# Altium PCB PCB1.PcbDoc
Units mm, origin at the board's own origin, x right, y up, seen from the top; angles counter-clockwise.
Board outline 40 x 47 mm, 2 copper layers (Top Layer, Bottom Layer); 27 components, 45 nets, 130 pads, 11 vias.
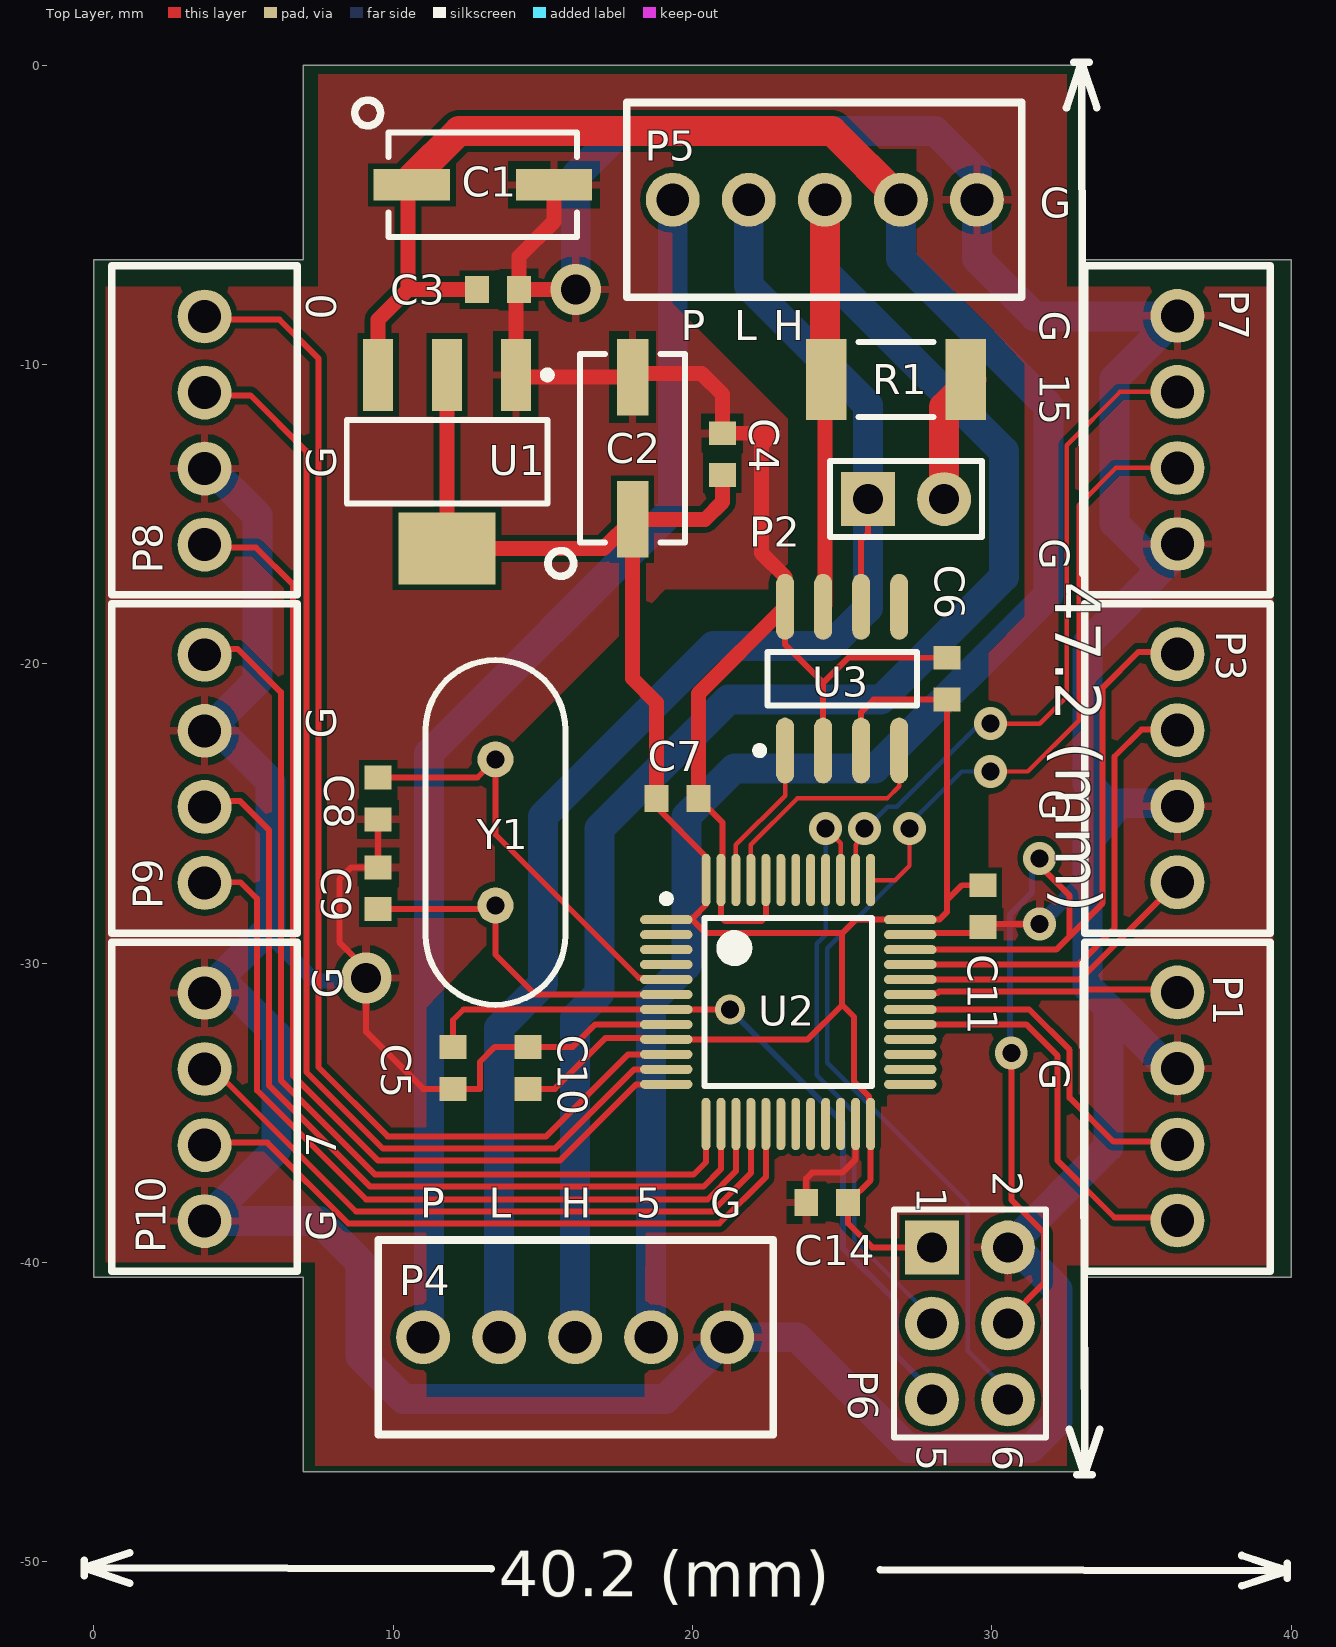
[diagram p0: Top Layer view]
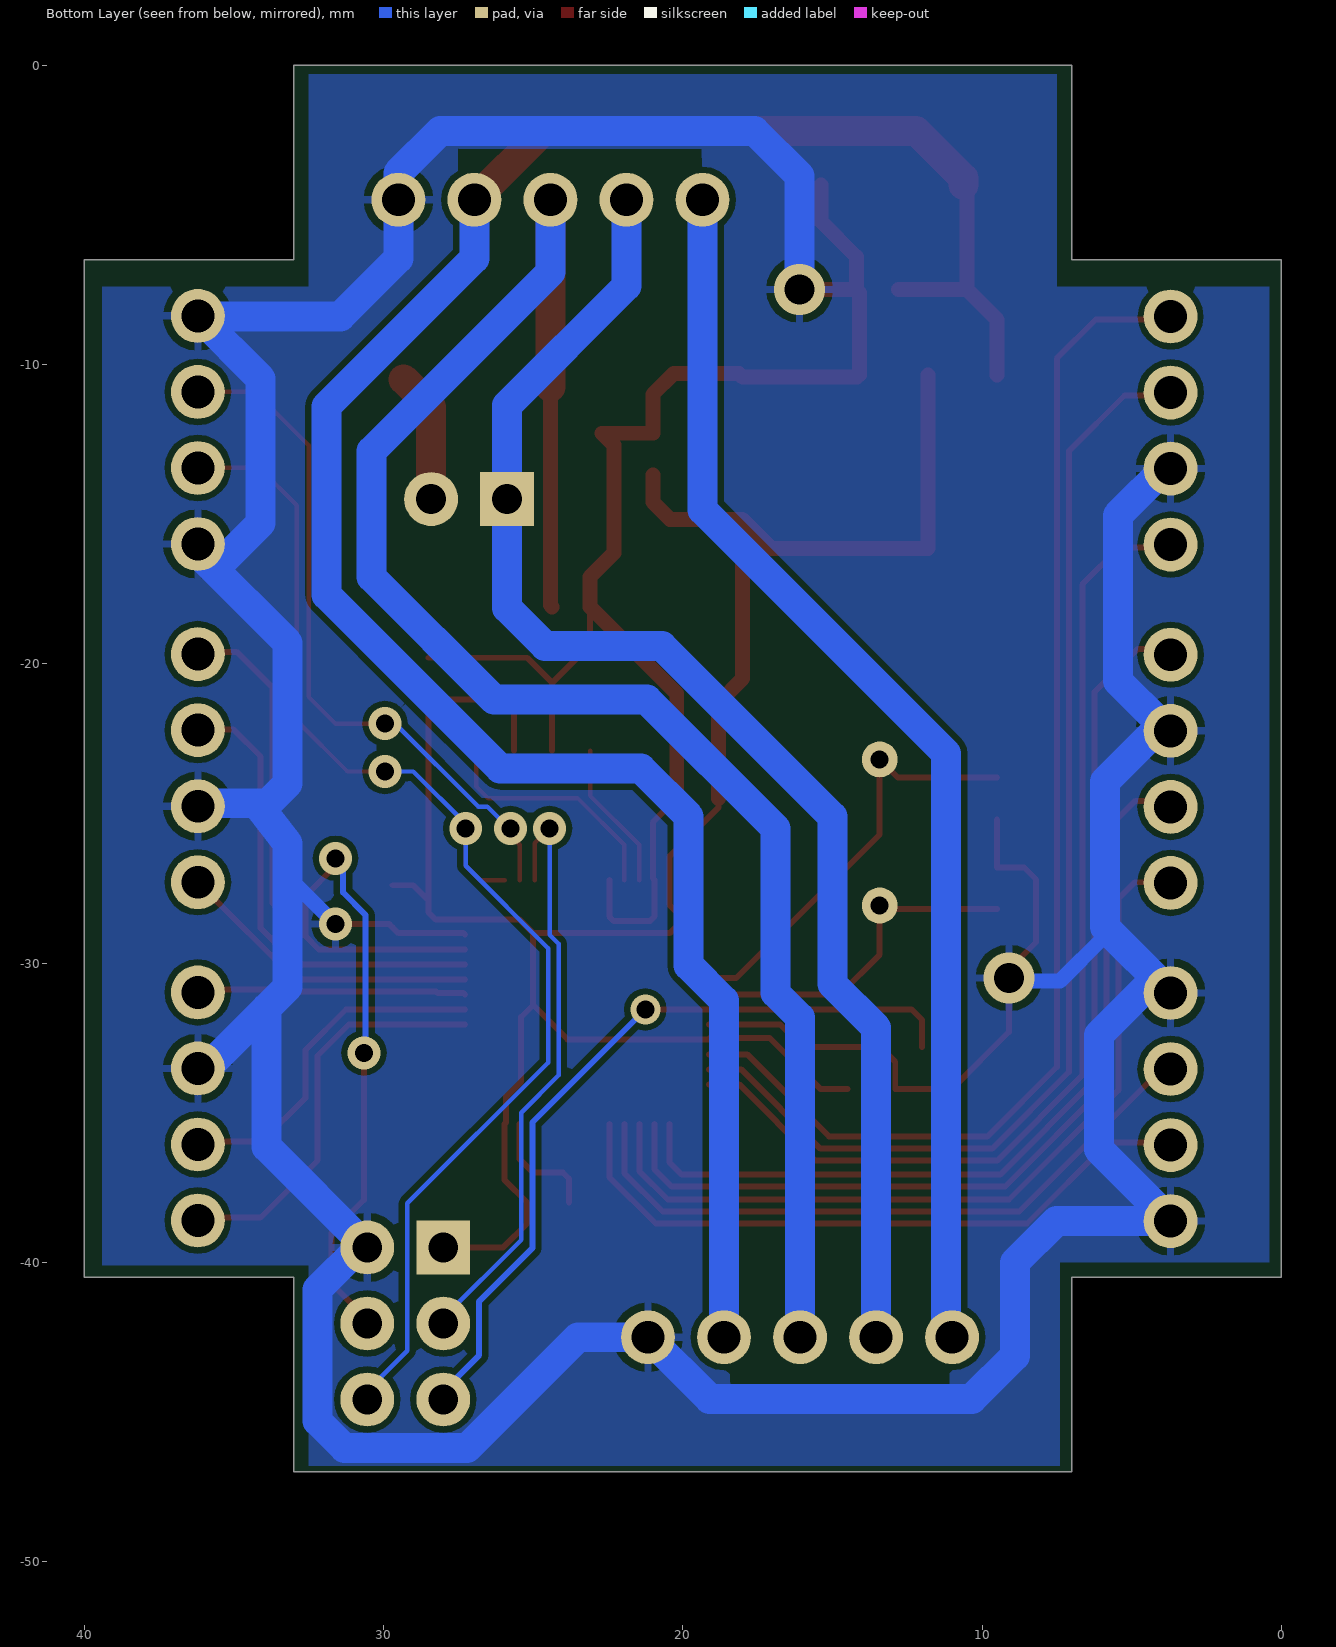
[diagram p1: Bottom Layer view, seen from below]

## Layer stack, top to bottom
Top Layer: signal copper 0.0356
Dielectric: dielectric 0.32, FR-4, Dk 4.8
Bottom Layer: signal copper 0.0356

## Board outline
7,-40.5 7,-47 33,-47 33,-40.5 40,-40.5 40,-6.5 33,-6.5 33,0 7,0 7,-6.5 0,-6.5 0,-40.5

## Design rules (kind name [scope] priority, off if disabled: settings)
Clearance [All] p1: gap=0.2
ComponentClearance Connectors [InComponent('P*') vs InComponent('P*')] p1: gap=0 collisioncheckmode=3 verticalgap=0.254 showdistances=FALSE
ComponentClearance All [All] p2: gap=0.254 collisioncheckmode=3 verticalgap=0.254 showdistances=FALSE
HoleSize [All] p1: absolutevalues=TRUE maxlimit=4 minlimit=0.4 maxpercent=80.000 minpercent=20.000
HoleToHoleClearance [All] p1: gap=0.2 allowstackedmicrovias=TRUE
MinimumSolderMaskSliver [All] p1: minsoldermaskwidth=0.25
PolygonConnect [All] p1: connectstyle=Relief reliefconductorwidth=0.254 reliefentries=4 polygonreliefangle="90 Angle" airgapwidth=0.254
RoutingVias [All] p1: holewidth=0.4 width=0.9 viastyle="Through Hole" minholewidth=0.4 minwidth=0.9 maxholewidth=0.8 maxwidth=1.3
SilkToSilkClearance [All] p1: silktosilkclearance=0.25
SilkToSolderMaskClearance [IsPad] p1: minsilkscreentomaskgap=0.075 clearancetoexposedcopper=TRUE
SolderMaskExpansion [All] p1: expansion=0.102
Width [All] p1: maxlimit=1 minlimit=0.15 preferedwidth=0.15
22 further rules are at their usual default settings.

## Components (designator, comment, footprint, x,y, rotation, side; value= is the part's Value field where it differs from the comment)
C1 "Cap Pol3" CAPM6032X28N 13,-4 r0 top
C2 "Cap Pol3" CAPM6032X28N 18,-12.8 r90 top
C3 "Cap Semi" 1608[0603] 13.5,-7.5 r180 top
C4 "Cap Semi" 1608[0603] 21,-13 r270 top
C5 "Cap Semi" 1608[0603] 12,-33.5 r270 top
C6 "Cap Semi" 1608[0603] 28.5,-20.5 r270 top
C7 "Cap Semi" 1608[0603] 19.5,-24.5 r180 top
C8 "Cap Semi" 1608[0603] 9.5,-24.5 r90 top
C9 "Cap Semi" 1608[0603] 9.5,-27.5 r270 top
C10 "Cap Semi" 1608[0603] 14.5,-33.5 r270 top
C11 "Cap Semi" 1608[0603] 29.7,-28.1 r90 top
C14 "Cap Semi" 1608[0603] 24.5,-38 r0 top
P1 "Header 4" PH_CONN_4 32.9,-40.4 r90 top
P2 "CAN_TERM" HDR1X2 25.865,-14.5 r0 top
P3 "Header 4" PH_CONN_4 32.9,-29.1 r90 top
P4 "Header 5" CONN_5 11,-42.5 r0 top
P5 "Header 5" CONN_5 29.5,-4.5 r180 top
P6 "Header 6" HDR2X3 28,-39.5 r270 top
P7 "Header 4" PH_CONN_4 32.9,-17.8 r90 top
P8 "Header 4" PH_CONN_4 7,-6.6 r270 top
P9 "Header 4" PH_CONN_4 7,-17.9 r270 top
P10 "Header 4" PH_CONN_4 7,-29.2 r270 top
R1 "Res3" RESC5025X07N 26.8,-10.5 r180 top
U1 "LD1117S33" SOT230P700X180-4N 11.8,-13.25 r270 top
U2 "STM32F303" TSQFP50P900X900X160-48N 23.2,-31.3 r0 top
U3 "SN65HVD230DR" SOIC127P600X175-8N 25,-20.5 r90 top
Y1 "XTAL" HC49/US 12.5,-28.5 r315 top

## Footprints (in the part's own frame and the unit in brackets; to place one, negate y for a bottom-side part, rotate by r counter-clockwise, add the part's x,y. Pads: shape width x height; smd on the part's side, far side on the other; paste and mask are expansions set on the pad)
1608[0603] [mm] "Chip Capacitor, Body 1.6x0.8mm, IPC High Density"
  rect 0.8x0.9 smd: 1(-0.7,0) 2(0.7,0)
  body extent -0.87,-0.48 0.87,0.48, height 1.3
CAPM6032X28N [mm] "Molded Capacitor, 2-Leads, Body 6.00x3.20mm, IPC Medium Density"
  rect 2.55x1.05 smd: 1(-2.375,0) 2(2.375,0)
  silkscreen extent -4.28,-1.75 3.15,2.83, body extent -3.15,-1.75 3.15,1.75, height 2.8
CONN_5 [mm]
  round 1.8 hole 1.1: 1(0,0) 2(2.54,0) 3(5.08,0) 4(7.62,0) 5(10.16,0)
  silkscreen extent -1.5,-3.25 11.7,3.25
HC49/US [mm]
  round 1.2 hole 0.6: 1(-3.1,4.4) 2(0.351,0.949)
  silkscreen extent -6.13,-2.08 3.38,7.43
HDR1X2 [mm] "Connector; Header; 2 Position"
  rect 1.8x1.8 hole 1: 1(0,0)
  round 1.8 hole 1: 2(2.54,0)
  silkscreen extent -1.27,-1.27 3.81,1.27
HDR2X3 [mm] "Connector; Header; 3x2 Position"
  rect 1.8x1.8 hole 1: 1(0,0)
  round 1.8 hole 1: 2(0,2.54) 3(2.54,0) 4(2.54,2.54) 5(5.08,0) 6(5.08,2.54)
  silkscreen extent -1.27,-1.27 6.35,3.81
PH_CONN_4 [mm]
  round 1.8 hole 1.1: 1(1.8,-3.3) 2(4.34,-3.3) 3(6.88,-3.3) 4(9.42,-3.3)
  silkscreen extent 0.1,-6.4 11.1,-0.2
RESC5025X07N [mm] "Chip Resistor, 2-Leads, Body 5.00x2.50mm, IPC Medium Density"
  rect 1.35x2.7 smd: 1(-2.325,0) 2(2.325,0)
  silkscreen extent -1.25,-1.25 1.25,1.25, body extent -2.57,-1.33 2.58,1.32, height 0.7
SOIC127P600X175-8N [mm] "SOIC, 8-Leads, Body 4.90x3.90mm, Pitch 1.27mm, IPC Medium Density"
  oval 2.2x0.6 smd: 1(-2.4,1.905) 2(-2.4,0.635) 3(-2.4,-0.635) 4(-2.4,-1.905) 5(2.4,-1.905) 6(2.4,-0.635) 7(2.4,0.635) 8(2.4,1.905)
  silkscreen extent -2.52,-2.5 0.9,2.88, body extent -2,-2.5 2,2.5, height 1.75
SOT230P700X180-4N [mm] "SOT223, 4-Leads, Body 6.50x7.00mm (avg), Pitch 2.30mm, IPC Medium Density"
  rect 2.4x1 smd: 1(-2.9,2.3) 2(-2.9,0) 3(-2.9,-2.3)
  rect 2.4x3.25 smd: 2(2.9,0)
  silkscreen extent -3.02,-3.35 1.4,3.48, body extent -1.85,-3.35 1.85,3.35, height 1.8
TSQFP50P900X900X160-48N [mm] "TSQFP, 48-Leads, Body 7.00x7.00mm, Pitch 0.50mm, IPC Medium Density"
  oval 1.75x0.3 smd: 1(-4.075,2.75) 2(-4.075,2.25) 3(-4.075,1.75) 4(-4.075,1.25) 5(-4.075,0.75) 6(-4.075,0.25) 7(-4.075,-0.25) 8(-4.075,-0.75) 9(-4.075,-1.25) 10(-4.075,-1.75) 11(-4.075,-2.25) 12(-4.075,-2.75) 25(4.075,-2.75) 26(4.075,-2.25) 27(4.075,-1.75) 28(4.075,-1.25) 29(4.075,-0.75) 30(4.075,-0.25) 31(4.075,0.25) 32(4.075,0.75) 33(4.075,1.25) 34(4.075,1.75) 35(4.075,2.25) 36(4.075,2.75)
  oval 0.3x1.75 smd: 13(-2.75,-4.075) 14(-2.25,-4.075) 15(-1.75,-4.075) 16(-1.25,-4.075) 17(-0.75,-4.075) 18(-0.25,-4.075) 19(0.25,-4.075) 20(0.75,-4.075) 21(1.25,-4.075) 22(1.75,-4.075) 23(2.25,-4.075) 24(2.75,-4.075) 37(2.75,4.075) 38(2.25,4.075) 39(1.75,4.075) 40(1.25,4.075) 41(0.75,4.075) 42(0.25,4.075) 43(-0.25,4.075) 44(-0.75,4.075) 45(-1.25,4.075) 46(-1.75,4.075) 47(-2.25,4.075) 48(-2.75,4.075)
  silkscreen extent -4.2,-2.8 2.8,3.57, body extent -3.5,-3.5 3.5,3.5, height 1.6

## Part data
C1 C2: "Polarized Capacitor (Surface Mount)"
C3 C4 C5 C6 C7 C8 C9 C10 C11 C14: "Capacitor (Semiconductor SIM Model)"
P1 P3 P7 P8 P9 P10: "Header, 4-Pin"
P2: library part "Header 2", "Header, 2-Pin"
P4 P5: "Header, 5-Pin"
P6: "Header, 6-Pin"
R1: "Resistor"
Y1: "Crystal Oscillator"

## Via types
v1: diameter 1.1, hole 0.6, Top Layer to Bottom Layer, 8 vias
v2: diameter 1.7, hole 1, Top Layer to Bottom Layer, 2 vias
v3: diameter 1, hole 0.6, Top Layer to Bottom Layer, 1 vias

## Nets (pads, with @x,y where several pads share a name; then routed paths per layer and width w, separated by ;. In a path a pad name is that pad's centre, name@x,y a point inside that pad or via, vN(x,y) a via of type N, cw(c..) or ccw(c..) an arc to the next point about the centre after c; other vN are vias at no path point)
5V: C1.1 C3.2 P4.4 P5.2 U1.3 | length 75.6
  Top Layer w0.5: U1.3 9.5,-8.5 10.5,-7.5 ; C1.1 10.5,-4.125 10.5,-7.5 ; C3.2 10.5,-7.5
  Top Layer w1: C1.1 10.625,-3.775 12.2,-2.2 24.66,-2.2 P5.2
  Bottom Layer w1: P4.4 18.62,-31.257 19.8,-30.077 19.8,-25.1 21.4,-23.5 26.1,-23.5 31.9,-17.7 31.9,-11.4 26.96,-6.46 P5.2
12V: P4.1 P5.5 | length 41.5
  Bottom Layer w1: P4.1 11.2,-42.3 11.2,-23 19.34,-14.86 P5.5
CAN_RX: U2.45 U3.4 | length 8.1
  Top Layer w0.15: U2.45 21.95,-26.05 23.5,-24.5 26.5,-24.5 26.905,-24.095 U3.4
CAN_TX: U2.46 U3.1 | length 5
  Top Layer w0.15: U2.46 21.45,-26.05 23.095,-24.405 U3.1
CANH: P4.3 P5.3 R1.2 U3.7 | length 63
  Top Layer w0.5: U3.7 24.42,-18.045 R1.2@24.42,-10.755
  Top Layer w1: R1.2@24.42,-10.755 P5.3
  Bottom Layer w1: P4.3 16.08,-31.82 16.9,-31 16.9,-25.5 21.2,-21.2 26.3,-21.2 30.4,-17.1 30.4,-12.9 24.42,-6.92 P5.3
CANL: P2.1 P4.2 P5.4 U3.6 | length 50.7
  Top Layer w0.2: U3.6 25.635,-15.865 25.865,-15.635 P2.1
  Bottom Layer w1: P4.2 13.54,-32.16 15,-30.7 15,-25.103 20.698,-19.405 24.595,-19.405 25.865,-18.135 P2.1 25.865,-11.365 21.88,-7.38 P5.4
GND: C1.2 C2.2 C3.1 C4.1 C5.2 C6.1 C7.1 C8.1 C9.1 C10.1 C11.1 C14.1 P1.3 P3.2 P4.5 P5.1 P6.2 P7.1 P7.4 P8.3 P9.2 P10.1 P10.4 U1.1 U2.8 U2.23 U2.35 U2.44 U2.47 U3.2 U3.8 | length 228.4
  Top Layer w0.2: C8.1 C9.1 8.6,-26.8 8.2,-27.2 8.2,-29.3 9.1,-30.2 9.1,-32.3 11,-34.2 C5.2 12.9,-34.2 12.9,-33.3 13.4,-32.8 C10.1 16,-32.8 16.75,-32.05 U2.8 ; U1.1 U1.1@14.175,-10.425 ; C7.1 21,-25.3 21,-27.175 U2.47 20.95,-28.45 21.1,-28.6 22.3,-28.6 22.45,-28.45 U2.44 ; U3.8 23.095,-19.365 24.365,-20.635 ; C14.1 23.8,-37.2 24,-37 25,-37 25.45,-36.55 U2.23 ; U3.2 24.365,-20.635 ; U2.35 27.325,-29 29.5,-29 C11.1 29.8,-28.7 v1(31.6,-28.7) ; C6.1 25.2,-19.8 24.365,-20.635
  Top Layer w0.5: U1.1 14.1,-7.6 C3.1 ; U1.1@14.175,-10.425 C2.2 18.125,-10.3 20.3,-10.3 21,-11 C4.1 22.7,-12.3 22.3,-12.7 22.3,-16.3 23.095,-17.095 U3.8 20.2,-20.995 C7.1 ; C1.2 15.375,-5.225 14.2,-6.4 C3.1 ; v2(16.1,-7.5) C3.1
  Bottom Layer w0.5: 5.9,-29.1 7.4,-30.6 9.3,-30.6 9.2,-30.5 v2(9.1,-30.5) ; v1(31.6,-28.7) 33.2,-27.1
  Bottom Layer w1: P10.4 6.1,-36.22 6.1,-32.4 P10.1@4.2,-30.5 ; P10.1 5.9,-28.8 5.9,-23.94 4,-22.04 5.462,-20.578 5.462,-15.042 P8.3@3.8,-13.38 ; P10.4@4.4,-38.62 7.52,-38.62 8.9,-40 8.9,-43.12 10.34,-44.56 19.1,-44.56 P4.5 23.5,-42.5 27.2,-46.2 31.3,-46.2 32.2,-45.3 32.2,-40.9 30.8,-39.5 P6.2 33.9,-36.14 33.9,-31.5 ; v2(16.1,-7.5) 16.1,-3.7 17.6,-2.2 28.1,-2.2 29.5,-3.6 P5.1 29.5,-6.46 31.44,-8.4 36.18,-8.4 34.1,-10.48 34.1,-15.3 35.3,-16.5 36,-16.5 33.2,-19.3 33.2,-24 33.9,-24.7 33.9,-24.66 P3.2@36,-24.66 ; 34.24,-24.66 33.2,-26 33.2,-30.8 33.9,-31.5 ; P1.3@36.4,-33.32 35.72,-33.32 33.9,-31.5
NetC8_2: C8.2 U2.5 Y1.1 | length 14.4
  Top Layer w0.2: C8.2 12.816,-23.8 Y1.1 13.419,-25.706 18.214,-30.5 19.075,-30.5 U2.5
NetC9_2: C9.2 U2.6 Y1.2 | length 11.9
  Top Layer w0.2: C9.2 13.296,-28.2 Y1.2 13.419,-29.719 14.75,-31.05 U2.6
NetP2_2: P2.2 R1.1 | length 4.4
  Top Layer w1: P2.2 28.405,-11.42 R1.1@29.325,-10.5
NRST: C5.1 P6.5 U2.7 | length 26.1
  Top Layer w0.2: C5.1 12,-31.9 12.35,-31.55 U2.7 v3(21.25,-31.55)
  Bottom Layer w0.2: v3(21.25,-31.55) 25.025,-35.325 25.025,-39.525 26.8,-41.3 26.8,-43.1 28,-44.3 P6.5
PA0: P8.1 U2.10 | length 41.4
  Top Layer w0.2: P8.1@4,-8.5 6.2,-8.5 7.5,-9.8 7.5,-33.472 9.814,-35.786 15.114,-35.786 17.85,-33.05 U2.10
PA1: P8.2 U2.11 | length 38.8
  Top Layer w0.2: P8.2@4,-11.04 5.24,-11.04 7.1,-12.9 7.1,-33.637 9.663,-36.2 15.4,-36.2 18.05,-33.55 U2.11
PA2: P8.4 U2.12 | length 34.3
  Top Layer w0.2: P8.4@4,-16.12 5.42,-16.12 6.65,-17.35 6.65,-33.753 9.497,-36.6 15.567,-36.6 18.117,-34.05 U2.12
PA3: P9.1 U2.13 | length 32.8
  Top Layer w0.2: P9.1@4,-19.5 4.8,-19.5 6.25,-20.95 6.25,-33.919 9.399,-37.067 20.033,-37.067 20.45,-36.65 U2.13
PA4: P9.3 U2.14 | length 29
  Top Layer w0.2: P9.3@4,-24.58 4.88,-24.58 5.85,-25.55 5.85,-34.084 9.233,-37.467 20.367,-37.467 20.95,-36.884 U2.14
PA5: P9.4 U2.15 | length 27.6
  Top Layer w0.2: P9.4@4,-27.12 4.18,-27.3 4.9,-27.3 5.45,-27.85 5.45,-34.25 9.1,-37.9 20.5,-37.9 21.45,-36.95 U2.15
PA6: P10.2 U2.16 | length 22.1
  Top Layer w0.2: P10.2@4,-33.54 8.76,-38.3 20.666,-38.3 21.95,-37.016 U2.16
PA7: P10.3 U2.17 | length 22.3
  Top Layer w0.2: P10.3 3.78,-36 5.8,-36 8.5,-38.7 20.9,-38.7 22.45,-37.15 U2.17
PA8: P1.1 U2.29 | length 13.4
  Top Layer w0.2: U2.29 31.15,-32.05 32.2,-33.1 32.2,-36.6 34.1,-38.5 P1.1@36,-38.5
PA9: P1.2 U2.30 | length 11.5
  Top Layer w0.2: U2.30 31.25,-31.55 32.6,-32.9 32.6,-34.5 34.06,-35.96 P1.2@36,-35.96
PA10: P1.4 U2.31 | length 8.8
  Top Layer w0.2: U2.31 27.325,-31 28.186,-31 28.236,-30.95 33.116,-30.95 33.186,-30.88 P1.4@36,-30.88
PA11: P3.1 U2.32 | length 10
  Top Layer w0.2: U2.32 32.95,-30.55 P3.1@36,-27.5
PA12: P3.3 U2.33 | length 15.4
  Top Layer w0.2: U2.33 32.884,-30.05 34.1,-28.834 34.1,-23.1 35,-22.2 35.78,-22.2 P3.3@36,-22.42
PA13: P3.4 P6.4 U2.34 | length 37.1
  Top Layer w0.2: U2.34 32.15,-29.55 32.6,-29.1 ; P6.4 30.54,-41.9 31.74,-40.7 31.74,-39.003 30.65,-37.913 v1(30.65,-33) ; v1(31.6,-26.5) 31.6,-26.75 32.6,-27.75 32.6,-29.1 ; P3.4@36,-19.88 35.72,-19.6 34.9,-19.6 33.7,-20.8 33.7,-28 32.6,-29.1
  Bottom Layer w0.2: v1@30.6,-33 30.6,-28.389 31.35,-27.639 31.35,-26.75 v1(31.6,-26.5)
PA14: P6.6 P7.2 U2.37 | length 45.3
  Top Layer w0.15: U2.37 26.775,-27.225 27.25,-26.75 v1(27.25,-25.5) v1@27.5,-25.25 ; v1(29.95,-23.6) 31.2,-23.6 32.9,-21.9 32.9,-14.7 34.14,-13.46 35.5,-13.46 P7.2@36,-13.96
  Bottom Layer w0.15: v1(27.25,-25.5) 27.25,-26.75 ; v1(29.95,-23.6) 29,-23.6 27.25,-25.35 27.25,-26.75 ; P6.6 30.54,-44.29 29.2,-42.95 29.2,-38.026 24.5,-33.326 24.5,-29.5 27.25,-26.75
PA15: P7.3 U2.38 | length 23.3
  Top Layer w0.15: U2.38 25.45,-26.05 25.75,-25.75 v1(25.75,-25.5) ; v1(29.95,-22) 31.6,-22 32.5,-21.1 32.5,-12.7 34.28,-10.92 35.5,-10.92 P7.3@36,-11.42
  Bottom Layer w0.15: v1(25.75,-25.5) 25.8,-25.5 26.525,-24.775 26.825,-24.775 29.6,-22 v1(29.95,-22)
PB0: U2.18
PB1: U2.19
PB2: U2.20
PB3: P6.3 U2.39 | length 20.2
  Top Layer w0.15: v1(24.45,-25.5) 24.95,-26 U2.39
  Bottom Layer w0.15: v1(24.45,-25.5) 24.45,-29.055 24.15,-29.355 24.15,-33.75 25.4,-35 25.4,-39.25 28,-41.85 P6.3
PB4: U2.40
PB5: U2.41
PB6: U2.42
PB7: U2.43
PB10: U2.21
PB11: U2.22
PB12: U2.25
PB13: U2.26
PB14: U2.27
PB15: U2.28
PC13: U2.2
PC14: U2.3
PC15: U2.4
VDD: C2.1 C4.2 C6.2 C7.2 C10.2 C11.2 C14.2 P6.1 U1.2 U2.1 U2.9 U2.24 U2.36 U2.48 U3.3 | length 78.5
  Top Layer w0.2: C10.2 15.4,-34.2 17.1,-32.5 19.075,-32.5 U2.9 23.85,-32.55 25,-31.4 ; C7.2 18.8,-24.8 20.45,-26.45 U2.48 20.45,-28.05 20.036,-28.464 20.036,-28.6 20.436,-29 25,-29 ; U3.3 25.635,-21.615 26.05,-21.2 C6.2 28.5,-28.3 ; P6.1 26,-39.5 25.2,-38.7 C14.2 25.95,-37.25 U2.24 25.9,-35.325 25.9,-34.464 25.4,-33.964 25.4,-31.8 25,-31.4 ; C11.2 29,-27.4 28.5,-27.9 28.5,-28.3 ; 25,-31.4 25,-29 ; 25,-29 25.45,-28.55 U2.36 28.25,-28.55 28.5,-28.3
  Top Layer w0.5: U1.2@11.8,-10.35 11.8,-16.15 17.025,-16.15 C2.1 ; C7.2 18.8,-21.3 18,-20.5 C2.1 ; C4.2 21,-14.6 20.425,-15.175 C2.1
pads on no net: U3.5

## Polygon pours and split planes (outlines as drawn)
GND on Top Layer "Bottom Layer-No Net" (solid, remove dead copper, pour order 4): 0.4,-7.4 7.5,-7.4 7.5,-0.3 32.5,-0.3 32.5,-7.4 39.4,-7.4 39.4,-40.1 32.5,-40.1 32.5,-46.8 7.4,-46.8 7.4,-40 0.4,-40
GND on Bottom Layer "Bottom Layer-No Net" (solid, remove dead copper, pour order 4): 0.4,-7.4 7.5,-7.4 7.5,-0.3 32.5,-0.3 32.5,-7.4 39.4,-7.4 39.4,-40.1 32.5,-40.1 32.5,-46.8 7.4,-46.8 7.4,-40 0.4,-40

## Other copper
Top Layer:
  pour cut-out: 11.1,-44.5 18.4,-44.5 18.4,-44.3 18.5,-31.3 19.781,-30.096 19.781,-25.119 21.381,-23.519 26.081,-23.519 31.1,-18.406 31.1,-10 30,-8.8 27.5,-6.3 27.5,-2.8 19.381,-2.819 19.321,-4.519 19.321,-7.959 23.181,-11.819 23.181,-16.419 23.2,-17.5 22.081,-17.519 19.097,-17.519 13.4,-23.216 13.4,-29.1 11.1,-31.5
  pour cut-out: 19.1,-34.8 19.1,-22.9 28.1,-22.9 28.2,-22.8 28.3,-19.6 29.9,-19.6 29.9,-27.5 26.6,-27.5 26.5,-27.4 26.5,-34.8
Bottom Layer:
  pour cut-out: 11.1,-44.5 18.4,-44.5 18.4,-44.3 18.5,-31.3 19.781,-30.096 19.781,-25.119 21.381,-23.519 26.081,-23.519 31.1,-18.406 31.1,-10 30,-8.8 27.5,-6.3 27.5,-2.8 19.381,-2.819 19.321,-4.519 19.321,-7.959 23.181,-11.819 23.181,-16.419 23.2,-17.5 22.081,-17.519 19.097,-17.519 13.4,-23.216 13.4,-29.1 11.1,-31.5

## Silkscreen, mask and mechanical layers (free items; w line width, h text height)
Top Overlay:
  lines w0.254: -0.326,-50.458 -0.325,-49.95 ; 1.197,-50.716 -0.325,-50.204 ; 1.2,-49.7 -0.325,-50.204 ; 13.274,-50.238 -0.325,-50.204 ; 26.275,-50.27 39.875,-50.304 ; 32.495,-1.425 33,0.1 ; 32.589,-45.577 33.1,-47.1 ; 32.746,0.099 33.254,0.101 ; 32.846,-47.101 33.354,-47.099 ; 33.036,-17 33,0.1 ; 33.064,-30 33.1,-47.1 ; 33.511,-1.423 33,0.1 ; 33.605,-45.575 33.1,-47.1 ; 38.349,-50.808 39.875,-50.304 ; 38.352,-49.792 39.875,-50.304 ; 39.874,-50.558 39.875,-50.05
  text "G" at 31.6,-5.1 h1
  text "G" at 31.6,-8.2 h1 r270
  text "0" at 8.1,-8.5 h1 r90
  text "P" at 19.6,-9.2 h1
  text "L" at 21.4,-9.2 h1
  text "H" at 22.7,-9.2 h1
  text "15" at 31.6,-10.3 h1 r270
  text "G" at 8.1,-13.8 h1 r90
  text "G" at 31.6,-15.8 h1 r270
  text "47.2 (mm)" at 32.123,-17.256 h1.52 r270.12
  text "G" at 8.1,-22.5 h1 r90
  text "G" at 31.6,-24.2 h1 r270
  text "G" at 8.3,-31.2 h1 r90
  text "G" at 31.6,-33.2 h1 r270
  text "7" at 8.1,-36.5 h1 r90
  text "P" at 10.9,-38.5 h1
  text "L" at 13.2,-38.5 h1
  text "H" at 15.6,-38.5 h1
  text "5" at 18.1,-38.5 h1
  text "G" at 20.6,-38.5 h1
  text "G" at 8.1,-39.3 h1 r90
  text "40.2 (mm)" at 13.526,-51.153 h1.52 r359.86
Mechanical 1:
  lines w0.2: 0,-40 0,-7 ; 7,-40.4 7,-47 ; 40,-40 40,-7 ; 7,-47 33,-47 ; 7,-47 7,-40.5 0,-40.5 0,-6.5 7,-6.5 ; 7,-47 33,-47 ; 7,-6.5 7,0 ; 7,-6.5 7,0 ; 7,0 33,0 ; 7,0 33,0 ; 33,-47 33,-40.5 ; 33,-47 33,-40.5 ; 33,-40.5 40,-40.5 40,-6.5 33,-6.5 ; 33,-6.5 33,0 ; 33,-6.5 33,0

## Text inside footprints (layer, text, board x,y; h text height)
P6: Top Overlay "6" at 30.032,-46.104 h1 r270; Top Overlay "5" at 27.492,-46.104 h1 r270; Top Overlay "2" at 30.032,-36.96 h1 r270; Top Overlay "1" at 27.492,-37.468 h1 r270